# Altium PCB GT502W_M95.PcbDoc (part 2 of 2)
Units mm, origin at the board's own origin, x right, y up, seen from the top; angles counter-clockwise.
Board outline 52.64 x 68.35 mm, 2 copper layers (Top Layer, Bottom Layer), stack 0.268 mm thick; 151 components, 116 nets, 541 pads, 423 vias.
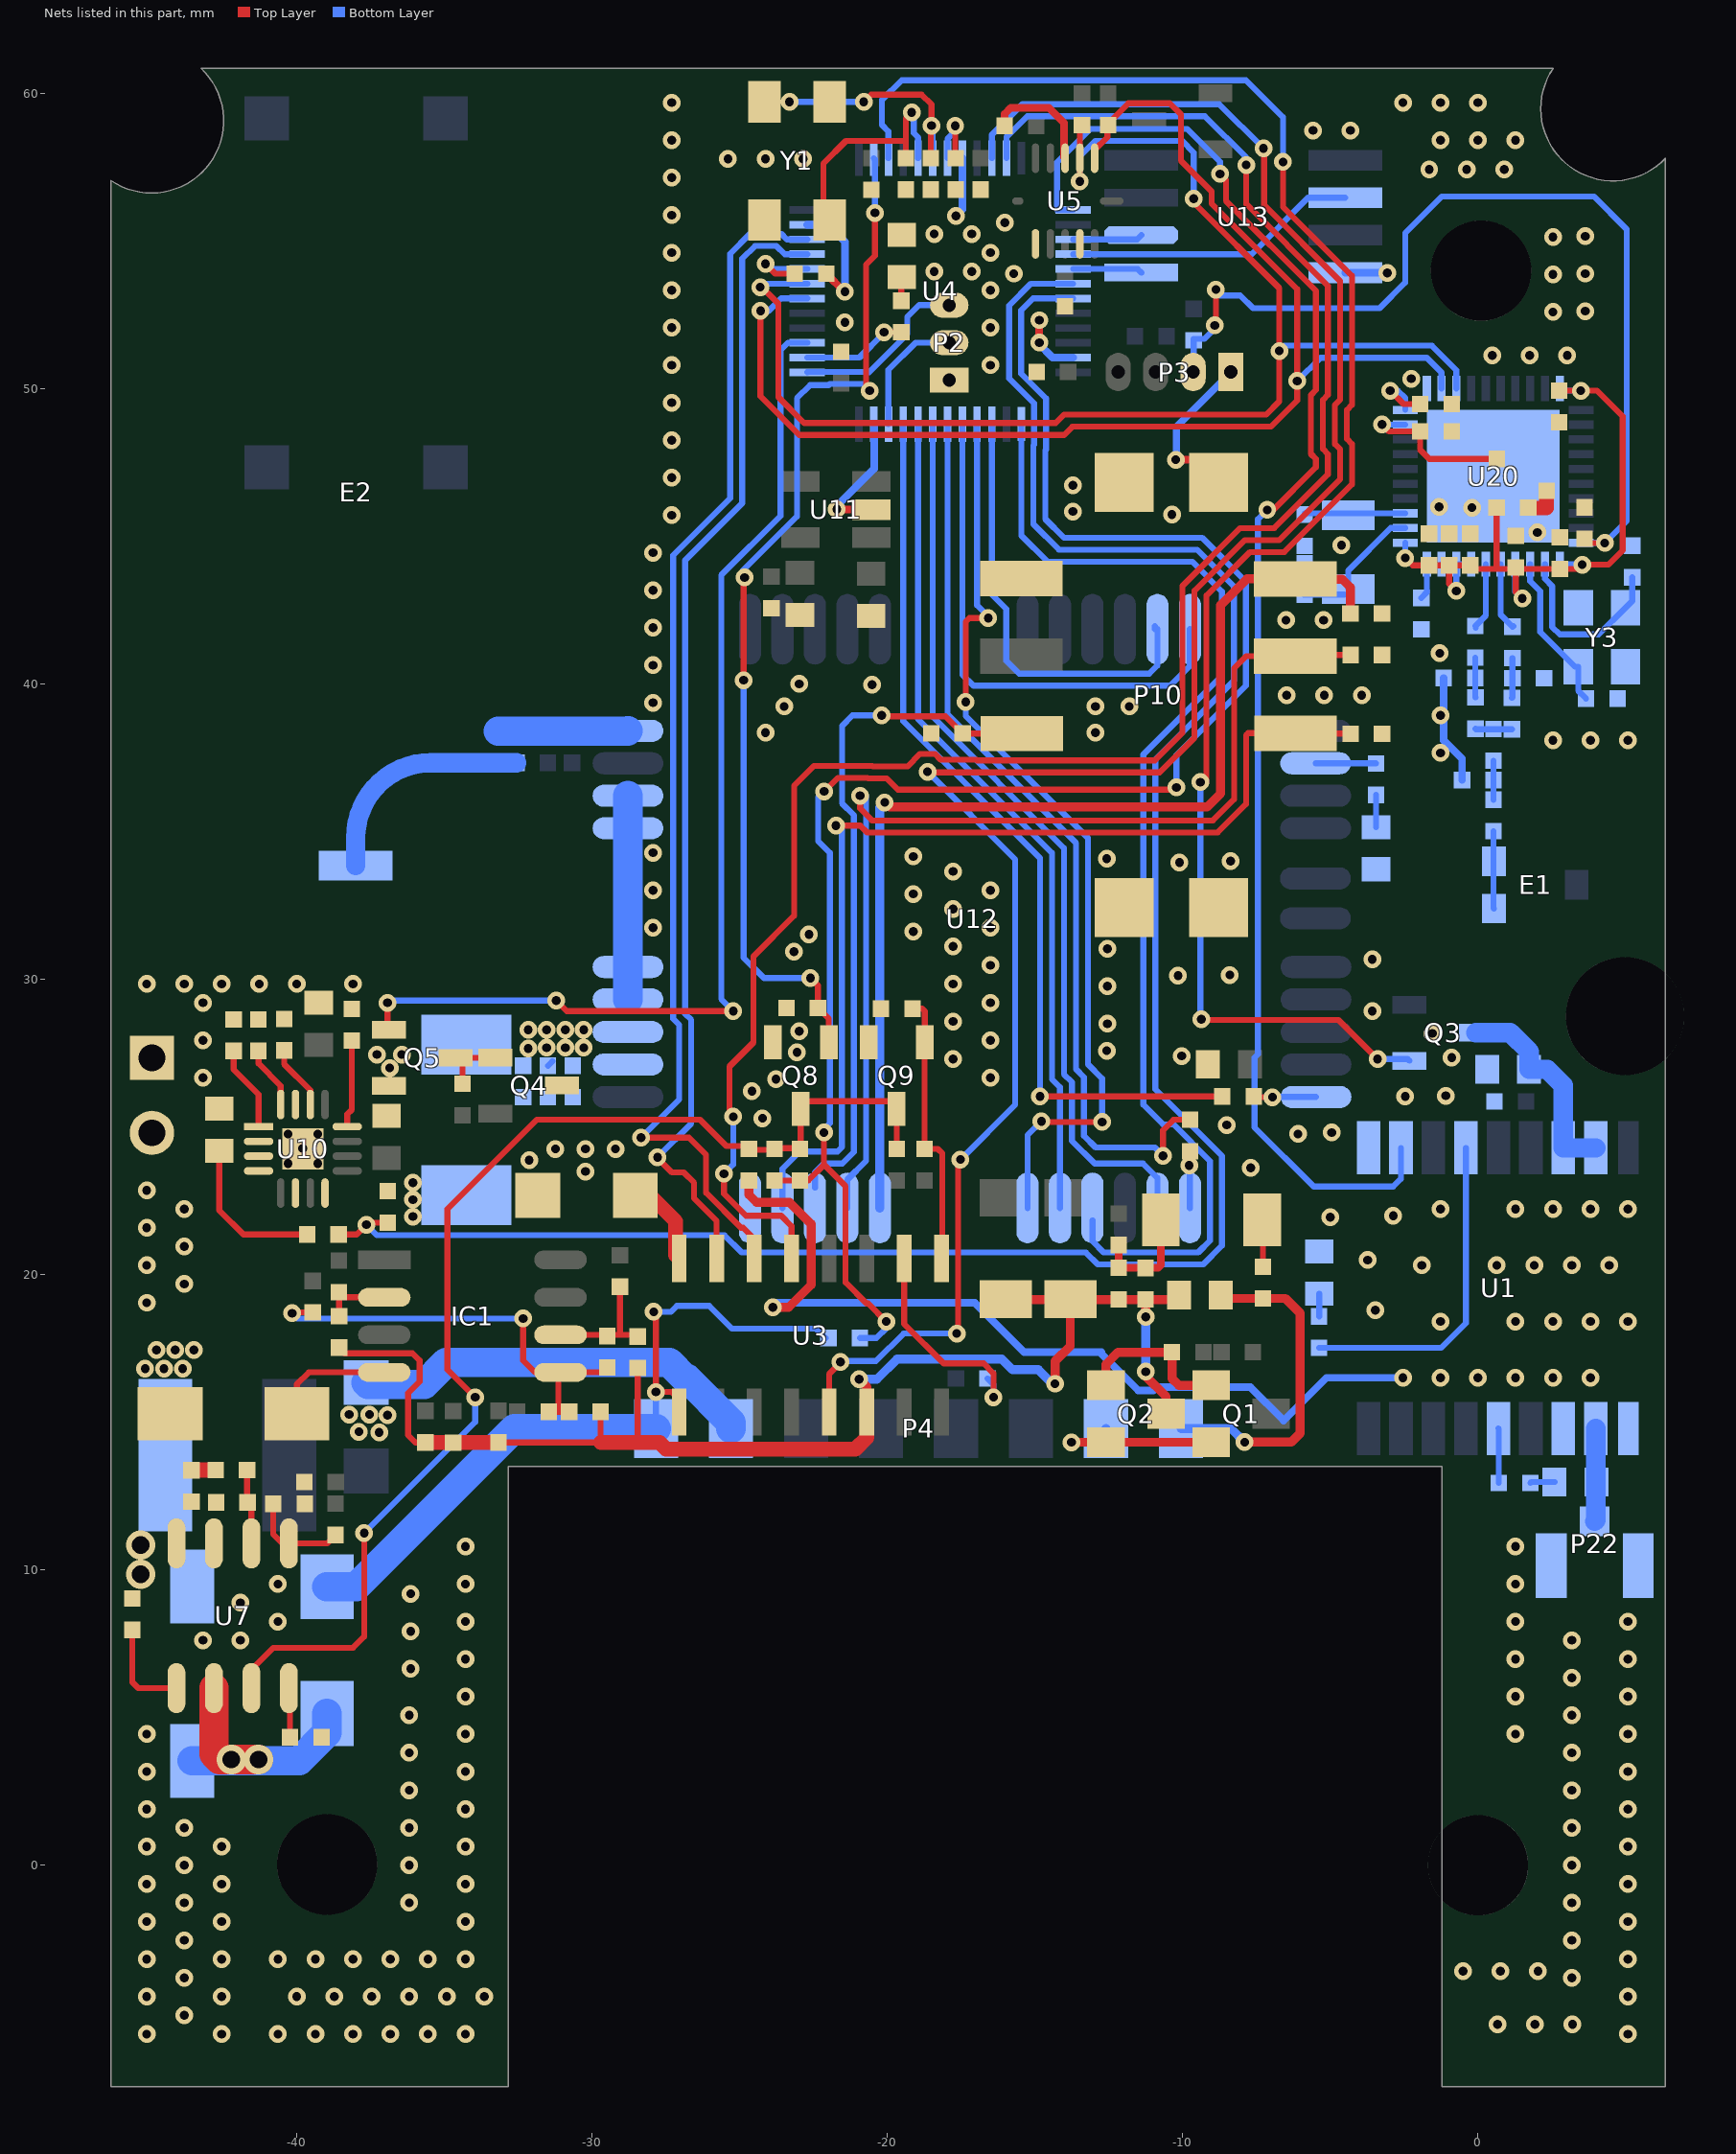
[diagram p2: the nets of this part, all layers, seen from the top]

## Via types
v1: diameter 0.6, hole 0.3, Top Layer to Bottom Layer, 412 vias
v2: diameter 1, hole 0.6, Top Layer to Bottom Layer, 6 vias
v3: diameter 0.3, hole 0.3, Top Layer to Bottom Layer, tented top, 5 vias

## Nets (pads, with @x,y where several pads share a name; then routed paths per layer and width w, separated by ;. In a path a pad name is that pad's centre, name@x,y a point inside that pad or via, vN(x,y) a via of type N, cw(c..) or ccw(c..) an arc to the next point about the centre after c; other vN are vias at no path point) (continued)
GND: C5.1 C6.2 C8.1 C10.2 C11.2 C12.2 C13.2 C14.1 C15.2 C17.2 C18.1 C19.2 C20.1 C21.2 C22.2 C25.1 C32.1 C40.1 C48.2 C49.2 C51.1 C53.2 C55.2 C56.2 C57.1 C58.1 C59.1 C62.1 C63.1 C70.1 C71.2 C72.2 C73.2 C74.2 C76.2 C77.2 C81.2 C82.2 C83.2 C84.1 C86.1 C87.1 C88.1 C89.1 C90.1 C91.1 C94.1 C95.1 C96.1 D2.2 D5.1 D9.2 D14.2 F3.2 IC1.4 L2.2 P2.1 P3.1 P4.2 P10.5 P10.8 P10.9 P10.10 P10.11 P13.1 P22.2 P22.3 Q5.2 Q8.2 Q9.2 R4.1 R11.1 R21.1 R43.2 R44.2 R45.2 R58.1 R88.2 R93.2 R96.1 R99.1 U1.1 U1.10 U1.12 U4.8 U4.23 U4.35 U4.47 U5.1 U5.4 U5.8 U7.7 U10.4 U10.6 U10.8 U10.15 U10.17 U11.2 U12.31 U12.35 U12.36 U12.37 U12.38 U12.40 U13.4 U20.1 U20.41 Y1.2 Y1.4 Y3.2 Y3.4 | length 87.2
  Top Layer w0.203: D5.1@-39.994,15.3 -39.994,16.292 -39.593,16.693 IC1.4@-37.039,16.693
  Top Layer w0.254: R11.1@-22.073,53.899 -21.463,53.289 v1(-21.438,53.289) ; v1(-21.717,45.923) -21.703,45.909 U11.2@-20.549,45.909 ; C14.1@-16.027,58.903 -16.027,59.309 -15.824,59.512 -14.529,59.512 -14.021,59.004 -14.021,57.846 U5.8@-13.984,57.809 ; v1(-14.859,51.562) v1(-14.859,52.324) ; v1(-10.236,47.6) -9.551,47.6 P10.10@-8.786,46.835 ; v1(-3.073,53.924) v1@-2.972,53.924
  Top Layer w0.305: R4.1@-24.689,23.19 -24.689,22.708 -24.435,22.454 -23.317,22.454 -22.579,21.715 -22.579,19.661 -23.342,18.898 v1(-23.876,18.898)
  Bottom Layer w0.254: v1(-23.876,18.898) -23.728,19.045 -17.039,19.045 -15.372,17.378 -12.751,17.378 -12.751,17.321 -11.513,16.083 -10.991,16.083 -10.883,16.191 -7.709,16.191 -6.58,15.062 -5.132,16.51 v1(-2.54,16.51) ; U4.47@-22.714,55.559 -22.02,55.559 -21.438,54.976 v1(-21.438,53.289) ; v1(-21.717,45.923) -21.717,46.025 -20.452,47.29 -20.452,48.797 U4.35@-20.464,48.809 ; v1(-17.678,55.855) -17.464,56.069 U4.8@-17.464,57.809 ; v1(-14.859,51.562) -14.884,51.537 -14.884,51.535 -14.408,51.059 U4.23@-13.714,51.059 ; v1(-10.236,47.6) -10.211,47.625 -10.211,48.711 -8.375,50.546 P3.1@-8.375,50.57 ; U13.4@-4.499,53.932 -3.081,53.932 v1(-3.073,53.924) ; C81.2@-1.16,40.21 -1.16,38.091 -0.54,37.471 C82.2@-0.54,36.748
  Bottom Layer w1: C21.2@-37.653,16.347 -37.588,16.281 -35.687,16.281 -34.938,17.031 -27.394,17.031 -26.856,16.493 -26.795,16.493 -25.296,14.994 P4.2@-25.296,14.79 ; C62.1@-33.172,38.405 C63.1@-30.683,38.405 -28.8,38.405 U12.40@-28.786,38.419 ; U12.35@-28.786,29.319 U12.36@-28.786,30.419 U12.37@-28.786,35.119 U12.38@-28.786,36.219
  other v1: -45.085,-5.715 -42.545,-5.715 -40.64,-5.715 -39.37,-5.715 -38.1,-5.715 -36.83,-5.715 -35.56,-5.715 -34.29,-5.715 5.08,-5.715 0.66,-5.385 1.93,-5.385 3.2,-5.385 -43.815,-5.08 -45.085,-4.445 -42.545,-4.445 -40.005,-4.445 -38.735,-4.445 -37.465,-4.445 -36.195,-4.445 -34.925,-4.445 -33.655,-4.445 5.08,-4.445 -43.815,-3.81 3.175,-3.81 -0.508,-3.581 0.762,-3.581 2.032,-3.581 -45.085,-3.175 -42.545,-3.175 -40.64,-3.175 -39.37,-3.175 -38.1,-3.175 -36.83,-3.175 -35.56,-3.175 -34.29,-3.175 5.08,-3.175 -43.815,-2.54 3.175,-2.54 -45.085,-1.905 -42.545,-1.905 -34.29,-1.905 5.08,-1.905 -43.815,-1.27 -36.195,-1.27 3.175,-1.27 -45.085,-0.635 -42.545,-0.635 -34.29,-0.635 5.08,-0.635 -43.815,0 -36.195,0 3.175,0 -45.085,0.635 -42.545,0.635 -34.29,0.635 5.08,0.635 -43.815,1.27 -36.195,1.27 3.175,1.27 -45.085,1.905 -34.29,1.905 5.08,1.905 -36.195,2.54 3.175,2.54 -45.085,3.175 -34.29,3.175 5.08,3.175 -36.195,3.81 3.175,3.81 -45.085,4.445 -34.29,4.445 1.27,4.445 5.08,4.445 -36.195,5.08 3.175,5.08 -34.29,5.715 1.27,5.715 5.08,5.715 3.175,6.35 -36.144,6.655 -34.29,6.985 1.27,6.985 5.08,6.985 -43.18,7.62 -41.91,7.62 3.175,7.62 -36.144,7.925 -40.64,8.255 -34.29,8.255 1.27,8.255 5.08,8.255 -41.91,8.89 -36.144,9.195 -40.64,9.525 -34.29,9.525 1.27,9.525 -34.29,10.795 1.27,10.795 -37.211,14.656 -37.897,14.681 -36.932,15.24 -38.227,15.265 -37.541,15.265 -1.27,16.51 0,16.51 1.27,16.51 2.54,16.51 3.81,16.51 -1.27,18.415 1.27,18.415 2.54,18.415 3.81,18.415 5.08,18.415 -3.48,18.796 -45.085,19.05 -43.815,19.685 -45.085,20.32 -1.905,20.32 0.635,20.32 1.905,20.32 3.175,20.32 4.445,20.32 -3.734,20.498 -43.815,20.955 -45.085,21.59 -5.004,21.946 -36.068,21.971 -2.87,21.996 -43.815,22.225 -1.27,22.225 1.27,22.225 2.54,22.225 3.81,22.225 5.08,22.225 -36.068,22.543 -45.085,22.86 -36.068,23.114 -30.226,23.495 -7.696,23.622 -32.131,23.876 -31.242,24.257 -30.226,24.257 -29.21,24.257 -6.096,24.765 -4.953,24.816 -8.509,25.07 -24.232,25.298 -2.464,26.035 -1.092,26.06 -24.587,26.213 -23.774,26.619 -43.18,26.67 -16.51,26.67 -36.855,27 -17.78,27.305 -0.889,27.356 -10.033,27.407 -37.287,27.457 -36.449,27.457 -23.063,27.534 -12.573,27.584 -43.18,27.94 -16.51,27.94 -1.549,28.169 -22.987,28.245 -12.548,28.499 -17.78,28.575 -3.581,28.931 -43.18,29.21 -16.51,29.21 -12.548,29.769 -45.085,29.845 -43.815,29.845 -42.545,29.845 -41.275,29.845 -40.005,29.845 -38.1,29.845 -17.78,29.845 -10.16,30.124 -8.407,30.15 -16.51,30.48 -3.581,30.683 -23.165,30.937 -12.548,31.039 -17.78,31.115 -22.657,31.521 -19.126,31.623 -27.94,31.75 -16.51,31.75 -17.78,32.385 -19.126,32.893 -27.94,33.02 -16.51,33.02 -17.78,33.655 -10.109,33.96 -8.382,34.011 -12.573,34.087 -19.126,34.163 -27.94,34.29 -1.27,37.668 2.54,38.1 3.81,38.1 5.08,38.1 -24.13,38.354 -12.954,38.354 -1.27,38.938 -23.495,39.243 -12.954,39.243 -11.811,39.243 -27.94,39.37 -6.477,39.624 -5.207,39.624 -3.937,39.624 -20.523,39.98 -22.987,40.005 -27.94,40.64 -1.295,41.046 -27.94,41.91 -6.502,42.164 -5.232,42.164 -27.94,43.18 -27.94,44.45 -4.623,44.704 2.007,45.136 -27.305,45.72 -10.363,45.745 -13.716,45.847 -0.203,45.974 -1.321,45.999 -13.716,46.736 -27.305,46.99 -27.305,48.26 -27.305,49.53 -2.261,50.343 -27.305,50.8 -16.51,50.8 0.483,51.13 1.753,51.13 3.023,51.13 -27.305,52.07 -16.51,52.07 -21.438,52.248 2.54,52.603 3.632,52.629 -27.305,53.34 -16.51,53.34 2.54,53.873 -15.723,53.899 3.632,53.899 -18.415,53.975 -17.145,53.975 -27.305,54.61 -16.51,54.61 2.54,55.143 3.632,55.169 -18.415,55.245 -17.145,55.245 -16.027,55.626 -27.305,55.88 -27.305,57.15 -1.651,57.429 -0.381,57.429 0.889,57.429 -25.4,57.785 -24.13,57.785 -22.86,57.785 -27.305,58.42 -1.27,58.42 0,58.42 1.27,58.42 -5.588,58.75 -4.318,58.75 -27.305,59.69 -2.54,59.69 -1.27,59.69 0,59.69
  other v3: -40.295,23.765 -39.295,23.765 -39.806,24.28 -40.295,24.765 -39.295,24.765
GPS_EN: Q3.1 U4.3 | length 58.7
  Top Layer w0.203: v1(-9.398,36.678) -9.214,36.678 -9.195,36.697 -9.195,42.996 -7.721,44.47 -6.561,44.47 -4.267,46.763 -4.267,48.128 -4.44,48.301 -4.44,49.286 -4.267,49.459 -4.267,53.823 -6.604,56.159 v1(-6.604,57.683) ; v1@-9.373,28.575 v1@-9.373,28.626 ; v1(-9.373,28.651) v1@-9.373,28.626 ; v1(-3.404,27.305) -4.724,28.626 v1@-9.373,28.626
  Bottom Layer w0.203: U4.3@-19.964,57.809 -19.964,58.717 -20.188,58.941 -20.188,59.779 -19.515,60.452 -7.857,60.452 -6.604,59.199 v1(-6.604,57.683) ; v1(-9.398,36.678) -9.398,28.677 v1(-9.373,28.651) ; v1(-3.404,27.305) -2.38,27.305 Q3.1@-2.319,27.244
GSM_DCD: U4.32 U12.25 | length 28.5
  Bottom Layer w0.203: U4.32@-18.964,48.809 -18.964,38.818 -14.427,34.281 -14.427,26.622 -14.156,26.351 U12.25@-14.156,22.259
GSM_DTR: R31.1 U4.33 | length 30.9
  Top Layer w0.203: v1(-14.834,26.035) R31.1@-8.661,26.035
  Bottom Layer w0.203: U4.33@-19.464,48.809 -19.464,38.743 -14.834,34.112 v1(-14.834,26.035)
GSM_POWER: U4.27 U12.10 | length 15
  Bottom Layer w0.203: U4.27@-16.464,48.809 -16.464,43.033 -15.977,42.545 -15.977,40.794 -15.537,40.354 -11.131,40.354 -10.856,40.63 U12.10@-10.856,41.859 ; U12.10@-10.947,41.859 U12.10@-10.947,41.961
GSM_PWR_EN: Q5.1 U4.39 | length 37.2
  Top Layer w0.203: v1(-36.932,29.21) -36.932,28.349 Q5.1@-36.877,28.294 ; v1(-31.217,29.286) -30.861,28.931 v1(-25.222,28.931)
  Bottom Layer w0.203: v1(-36.932,29.21) -36.855,29.286 v1(-31.217,29.286) ; v1(-25.222,28.931) -25.629,29.337 -25.629,43.688 -23.622,45.695 -23.622,51.309 -23.372,51.559 U4.39@-22.714,51.559
GSM_RI: U4.28 U12.26 | length 31.6
  Top Layer w0.203: v1(-17.348,39.395) -17.348,42.113 -17.221,42.24 v1(-16.586,42.24) ; v1(-14.783,25.197) -14.757,25.171 v1(-12.725,25.171)
  Bottom Layer w0.203: v1(-17.348,39.395) -17.348,38.926 -13.208,34.786 -13.208,27.127 -12.725,26.645 v1(-12.725,25.171) ; U4.28@-16.964,48.809 -16.964,42.669 -16.561,42.266 v1(-16.586,42.24) ; U12.26@-15.256,22.259 -15.256,24.724 v1(-14.783,25.197)
GSM_RST: U4.29 U12.11 | length 17.9
  Bottom Layer w0.203: U4.29@-17.464,48.809 -17.464,40.324 -17.088,39.948 -10.42,39.948 -9.756,40.613 U12.11@-9.756,41.859
GSM_RTS: U4.25 U12.24 | length 40.6
  Bottom Layer w0.203: U4.25@-15.464,48.809 -15.464,45.03 -14.58,44.145 -9.68,44.145 -8.669,43.134 -8.669,40.286 -11.336,37.619 -11.336,25.756 -10.672,25.091 -10.317,25.091 -9.076,23.85 -9.076,21.153 -9.474,20.754 -12.677,20.754 -13.056,21.133 U12.24@-13.056,21.844
HIGH-PASS: C39.1 IC1.5 R8.2 R37.2 R41.2 | length 15.2
  Top Layer w0.203: v1(-40.157,18.694) -40.13,18.722 C39.1@-39.46,18.722 ; v1(-32.334,18.517) -32.334,17.094 -31.933,16.693 IC1.5@-31.07,16.693 ; R41.2@-31.469,15.358 -31.115,15.358 ; R37.2@-30.779,15.361 -30.781,15.358 -31.115,15.358 ; R8.2@-29.486,16.857 -29.649,16.693 IC1.5@-31.07,16.693 ; -31.115,15.358 -31.14,15.383 -31.14,16.623 IC1.5@-31.07,16.693
  Bottom Layer w0.203: v1(-40.157,18.694) -39.98,18.517 v1(-32.334,18.517)
LED: R9.2 U4.38 | length 3.6
  Top Layer w0.203: v1(-20.117,51.918) R9.2@-19.533,51.918
  Bottom Layer w0.203: U4.38@-22.714,51.059 -20.95,51.059 -20.117,51.892 v1(-20.117,51.918)
NetC1_1: C1.1 D5.2 L1.1 U7.8
  other v1: -45.136,16.815 -44.501,16.815 -43.866,16.815 -44.755,17.45 -44.12,17.45 -43.485,17.45
  other v2: -45.288,9.855 -45.288,10.846
NetC1_2: C1.2 U7.1 | length 3.3
  Top Layer w0.203: C1.2@-45.573,7.97 -45.573,6.203 -45.37,6 U7.1@-44.079,6
NetC6_1: C6.1 U4.7 | length 2.3
  Top Layer w0.203: v1(-17.704,58.903) -17.704,57.826 C6.1@-17.69,57.812
  Bottom Layer w0.203: U4.7@-17.964,57.809 -17.964,58.467 -17.704,58.728 v1(-17.704,58.903)
NetC22_1: C22.1 D4.2 U7.2 | length 9.4
  Top Layer w1: U7.2@-42.809,6 -42.809,3.769 -42.621,3.581 v2(-42.215,3.581) v2(-41.3,3.581)
  Bottom Layer w1: C22.1@-43.544,3.54 -39.929,3.54 -38.98,4.488 D4.2@-38.98,5.14
NetC34_1: C34.1 R96.2 | length 0.8
  Top Layer w0.508: R96.2@-43.57,13.377 -43.561,13.386 C34.1@-42.753,13.386
NetC34_2: C34.2 C95.2 U7.6 | length 2.5
  Top Layer w0.203: C34.2@-41.687,13.386 -41.687,12.306 C95.2@-41.67,12.29 -41.539,12.158 U7.6@-41.539,10.9
NetC62_2: C62.2 E2.1 R78.2 | length 7.8
  Bottom Layer w0.66: E2.1@-38.008,33.853 -38.008,34.798 cw(c-35.468,34.798) -35.468,37.338 C62.2@-33.172,37.338 R78.2@-32.563,37.338
NetC78_1: C78.1 U20.25 | length 2.3
  Bottom Layer w0.203: U20.25@0.766,44.06 0.766,42.347 C78.1@1.168,41.946 ; C78.1@1.188,41.966 C78.1@1.194,41.961
NetC78_2: C78.2 C80.1 L2.1 | length 1.4
  Bottom Layer w0.203: C80.1@1.15,39.536 1.168,39.554 C78.2@1.168,40.879
NetC79_1: C79.1 U20.26 | length 2.3
  Bottom Layer w0.203: C79.1@-0.094,41.966 C79.1@-0.076,41.984 ; C79.1@-0.076,41.91 C79.1@-0.076,41.984 ; U20.26@0.266,44.06 0.266,42.326 C79.1@-0.076,41.984
NetC79_2: C79.2 C81.1 L5.1 | length 1.4
  Bottom Layer w0.203: C79.2@-0.094,40.899 -0.094,39.56 L5.1@-0.085,39.551
NetC80_2: C80.2 L3.1 L5.2 | length 1.2
  Bottom Layer w0.203: L5.2@-0.085,38.484 -0.07,38.469 C80.2@1.15,38.469
NetC82_1: C82.1 L3.2 L4.1 | length 1.3
  Bottom Layer w0.203: L4.1@0.525,36.088 L3.2@0.525,37.409
NetC83_1: C83.1 U20.40 | length 2.2
  Top Layer w0.203: v1(-2.972,49.936) -2.518,49.483 C83.1@-1.958,49.483
  Bottom Layer w0.203: v1(-2.972,49.936) -2.71,49.936 -2.459,49.686 U20.40@-2.459,49.286
NetC84_2: C84.2 U20.23 Y3.3 | length 5.4
  Bottom Layer w0.203: U20.23@1.766,44.06 1.766,43.49 2.108,43.148 2.108,41.767 3.287,40.588 Y3.3@3.395,40.588 3.395,39.777 C84.2@3.66,39.512
NetC86_2: C86.2 Q9.1 R82.2 U3.1 | length 9.4
  Top Layer w0.203: C86.2@-19.152,29.007 -18.821,29.007 -18.735,28.92 Q9.1@-18.735,27.871 -18.745,27.861 R82.2@-18.745,24.257 -18.288,24.257 -18.14,24.109 -18.14,20.572 U3.1@-18.163,20.549
NetC87_2: C87.2 U20.22 Y3.1 | length 6.3
  Bottom Layer w0.203: U20.22@2.266,44.06 2.266,43.564 2.515,43.316 2.515,41.935 2.769,41.681 4.089,41.681 Y3.1@4.993,42.585 5.221,42.813 C87.2@5.221,43.619
NetC88_2: C88.2 U20.33 Y4.1 | length 3.4
  Bottom Layer w0.203: C88.2@-5.867,45.771 -5.853,45.785 U20.33@-2.459,45.785
NetC89_2: C89.2 U20.32 Y4.2 | length 4.5
  Bottom Layer w0.203: C89.2@-5.893,43.028 C89.2@-5.867,43.028 Y4.2@-4.536,43.028 ; Y4.2@-4.394,43.22 -4.394,43.845 -2.955,45.285 U20.32@-2.459,45.285
NetC90_2: C90.2 U7.4 | length 1.7
  Top Layer w0.203: U7.4@-40.269,6 -40.23,5.962 C90.2@-40.23,4.339
NetD1_1: D1.1 R24.1 | length 1.6
  Top Layer w0.203: D1.1@-7.309,21.856 -7.281,21.827 R24.1@-7.281,20.264
NetD2_1: D2.1 R9.1 | length 0.8
  Top Layer w0.203: R9.1@-19.533,52.984 -19.533,53.77 D2.1@-19.51,53.792
NetD9_1: D9.1 R28.2 | length 0.8
  Bottom Layer w0.203: R28.2@-5.38,18.59 -5.38,19.355 D9.1@-5.377,19.359
NetD14_1: D14.1 R35.1 | length 1.1
  Bottom Layer w0.203: D14.1@-3.454,35.154 R35.1@-3.454,36.246
NetE1_1: E1.1 L4.2 | length 2.6
  Bottom Layer w0.203: L4.2@0.525,35.021 0.525,32.418 E1.1@0.542,32.401
NetF3_1: F3.1 U3.8 | length 3
  Top Layer w0.5: F3.1@-28.538,22.68 -28.04,22.68 -27.169,21.81 -27.169,20.665 U3.8@-27.053,20.549
NetFB1_2: FB1.2 R1.1 | length 1.2
  Top Layer w0.5: FB1.2@1.699,45.975 1.713,45.961 2.324,45.961 R1.1@2.324,46.549
NetIC1_2: IC1.2 R27.2 R36.2 | length 2.4
  Top Layer w0.203: R36.2@-38.58,19.411 R36.2@-38.572,19.403 ; R27.2@-38.572,18.598 R36.2@-38.572,19.403 ; IC1.2@-37.039,19.233 -38.402,19.233 R36.2@-38.572,19.403
NetIC1_6: IC1.6 R8.1 R38.1 R39.2 | length 4.3
  Top Layer w0.203: IC1.6@-31.07,17.963 -29.058,17.963 ; R39.2@-29.056,19.592 -29.056,17.965 -29.058,17.963 ; R38.1@-28.456,17.908 -28.511,17.963 -29.058,17.963
NetL68_1: L68.1 R77.1 | length 0.8
  Bottom Layer w0.203: R77.1@1.77,12.945 1.805,12.979 L68.1@2.591,12.979
NetL68_2: L68.2 P22.1 U1.11 | length 3.2
  Bottom Layer w0.66: P22.1@3.951,11.648 3.99,11.687 U1.11@3.99,14.794
NetQ1_1: Q1.1 Q2.1 R23.1 | length 5.4
  Top Layer w0.305: Q2.1@-12.598,16.256 -12.598,16.967 -12.192,17.374 R23.1@-10.363,17.374 -10.363,16.485 -10.135,16.256 Q1.1@-9.042,16.256
NetQ4_1: Q4.1 Q5.3 R49.2 | length 2.3
  Top Layer w0.203: R49.2@-34.392,26.467 -34.392,27.109 Q5.3@-34.627,27.344 -33.286,27.344 Q4.1@-33.274,27.356
NetR11_2: R11.2 U4.44 | length 2.6
  Top Layer w0.203: v1(-24.13,54.229) -23.8,53.899 R11.2@-23.139,53.899
  Bottom Layer w0.203: v1(-24.13,54.229) -23.96,54.059 U4.44@-22.714,54.059
NetR19_1: R19.1 R21.2 U7.5 | length 3.4
  Top Layer w0.203: R21.2@-40.8,12.244 -40.8,11.209 -40.491,10.9 U7.5@-40.269,10.9 -38.977,10.9 R19.1@-38.694,11.183
NetR28_1: R28.1 U1.4 | length 11.3
  Bottom Layer w0.203: R28.1@-5.38,17.523 -1.248,17.523 -0.41,18.361 U1.4@-0.41,24.294
NetR31_2: R31.2 U12.20 | length 2.1
  Top Layer w0.203: R31.2@-7.595,26.035 -7.569,26.01 v1(-6.96,26.01)
  Bottom Layer w0.203: v1(-6.96,26.01) -6.95,26.019 U12.20@-5.486,26.019
NetR33_2: R33.2 U12.21 | length 1.9
  Top Layer w0.203: v1(-9.779,23.698) -9.779,24.155 R33.2@-9.754,24.181
  Bottom Layer w0.203: v1(-9.779,23.698) -9.756,23.675 U12.21@-9.756,22.259 U12.21@-9.754,22.257
NetR35_2: R35.2 U12.13 | length 2
  Bottom Layer w0.203: U12.13@-5.496,37.319 -3.461,37.319 R35.2@-3.454,37.313
NetR43_1: R43.1 U10.12 | length 3
  Top Layer w0.203: U10.12@-38.295,25.015 -38.295,25.433 -38.14,25.589 R43.1@-38.14,27.93
NetR44_1: R44.1 U10.14 | length 2.2
  Top Layer w0.203: R44.1@-40.43,27.593 -40.43,27.132 -39.545,26.247 U10.14@-39.545,25.765
NetR45_1: R45.1 U10.16 | length 2.1
  Top Layer w0.203: R45.1@-41.3,27.58 -41.3,27.152 -40.545,26.398 U10.16@-40.545,25.765
NetR77_2: R77.2 U1.14 | length 1.9
  Bottom Layer w0.203: U1.14@0.69,14.794 0.703,14.78 R77.2@0.703,12.945
NetR83_1: R83.1 U3.2 | length 7.5
  Top Layer w0.203: U3.2@-19.433,20.549 -19.433,18.334 -18.092,16.993 -16.739,16.993 -16.408,16.662 v1(-16.408,15.85)
  Bottom Layer w0.203: R83.1@-16.612,16.485 -16.408,16.281 v1(-16.408,15.85)
NetR88_1: R88.1 U10.1 | length 2.9
  Top Layer w0.203: R88.1@-42.14,27.58 -42.14,26.951 -41.295,26.106 U10.1@-41.295,25.015
NetR99_2: R99.2 U20.30 | length 1.2
  Bottom Layer w0.203: R99.2@-1.92,42.92 -1.734,43.106 U20.30@-1.734,44.06
OSC1: C8.2 U4.5 Y1.3 | length 8.4
  Top Layer w0.203: Y1.3@-21.961,55.717 -22.169,55.925 -22.169,57.629 -21.404,58.395 -19.377,58.395 ; C8.2@-19.377,57.812 -19.377,58.395 ; v1(-19.177,59.36) -19.377,59.16 -19.377,58.395
  Bottom Layer w0.203: v1(-19.177,59.36) -19.112,59.295 -19.112,58.66 -18.964,58.512 U4.5@-18.964,57.809
OSC2: C15.1 U4.6 Y1.1 | length 8
  Top Layer w0.203: v1(-20.803,59.715) -20.553,59.965 -18.842,59.965 -18.507,59.63 v1(-18.507,58.91) -18.534,58.883 C15.1@-18.534,57.812
  Bottom Layer w0.203: v1(-23.317,59.715) v1(-20.803,59.715) ; v1(-18.507,58.91) -18.464,58.868 U4.6@-18.464,57.809
OUTPUT1: U3.7 U4.45 | length 38.8
  Top Layer w0.203: v1(-27.788,23.978) -27.788,23.952 -27.3,23.465 -26.902,23.465 -26.548,23.111 -26.548,22.585 -25.783,21.821 U3.7@-25.783,20.549
  Bottom Layer w0.203: v1(-27.788,23.978) -26.645,25.121 -26.645,28.629 -26.848,28.832 -26.848,44.193 -24.917,46.123 -24.917,54.407 -24.486,54.839 -23.757,54.839 -23.478,54.559 U4.45@-22.714,54.559
OUTPUT2: U3.6 U4.46 | length 41
  Top Layer w0.203: v1(-28.346,24.638) -26.721,24.638 -26.141,24.059 -26.141,22.773 -24.959,21.59 -24.884,21.59 -24.513,21.219 U3.6@-24.513,20.549
  Bottom Layer w0.203: v1(-28.346,24.638) -27.051,25.933 -27.051,28.46 -27.254,28.664 -27.254,44.361 -25.324,46.292 -25.324,54.575 -24.654,55.245 -23.589,55.245 -23.403,55.059 U4.46@-22.714,55.059
PEAK: C36.1 C37.1 D1.2 R25.1 | length 3.8
  Top Layer w0.254: C37.1@-12.168,21.006 -12.171,21.003 R25.1@-12.171,20.235 -10.83,20.235 -10.738,20.326 D1.2@-10.738,21.856
PW_ON: C68.1 Q8.3 Q9.3 R3.1 R4.2 R68.1 U7.3 | length 41.4
  Top Layer w0.203: U7.3@-41.539,6 -41.539,6.62 -40.792,7.366 -38.1,7.366 -37.719,7.747 v1(-37.719,11.252) ; v1(-33.96,15.85) -34.9,16.789 -34.9,22.225 -31.877,25.248 -26.34,25.248 -25.451,24.359 -24.702,24.359 R4.2@-24.625,24.282 ; R4.2@-24.625,24.232 C68.1@-23.774,24.232 ; C68.1@-23.774,24.282 -22.936,24.282 Q8.3@-22.936,25.621 -22.936,25.875 -19.685,25.875 Q9.3@-19.685,25.621 R3.1@-19.685,24.257
  Bottom Layer w0.203: v1(-37.719,11.252) -33.96,15.011 v1(-33.96,15.85)
PWR_EN: Q8.1 R93.1 U4.2 | length 35.5
  Top Layer w0.203: v1(-24.867,40.132) -24.867,43.586 v1(-24.841,43.612) ; v1(-22.606,30.048) -22.352,29.794 R93.1@-22.352,29.032 -21.986,28.666 Q8.1@-21.986,27.871 ; v1(-20.599,49.936) -20.722,50.059 -20.722,54.208 -20.422,54.508 v1(-20.422,55.956)
  Bottom Layer w0.203: v1(-24.867,40.132) -24.867,30.734 -24.181,30.048 v1(-22.606,30.048) ; v1(-24.841,43.612) -24.884,43.655 -24.884,43.858 -23.063,45.679 -23.063,49.682 -22.618,50.127 -21.988,50.127 -21.95,50.165 -20.828,50.165 v1(-20.599,49.936) ; U4.2@-20.464,57.809 -20.426,57.771 v1@-20.426,55.956
RFID_ANT1: P4.7 Q1.2 Q2.2 | length 6.1
  Top Layer w0.305: v1(-13.767,14.326) Q2.2@-12.598,14.326 Q1.2@-9.042,14.326
  Bottom Layer w0.305: v1(-13.767,14.326) -13.061,14.326 P4.7@-12.596,14.79
RFID_ANT2: C35.2 P4.8 R24.2 | length 11.4
  Top Layer w0.305: C35.2@-8.708,19.306 -8.6,19.198 R24.2@-7.281,19.198 -6.523,19.198 -6.02,18.694 -6.02,14.636 -6.325,14.33 v1(-7.904,14.33)
  Bottom Layer w0.305: P4.8@-10.056,14.79 -8.364,14.79 v1(-7.904,14.33)
RFID_CLK: U3.5 U4.11 | length 66
  Top Layer w0.203: v1(-25.534,23.419) -25.534,22.74 -24.79,21.996 -23.597,21.996 -23.243,21.643 U3.5@-23.243,20.549 ; v1(-25.222,25.349) -25.349,25.476 -25.349,27.051 -24.536,27.864 -24.536,30.782 -23.16,32.158 -23.16,36.553 -22.481,37.232 -20.511,37.232 -20.49,37.211 -19.321,37.211 -18.894,37.638 -18.393,37.638 -18.195,37.44 -16.993,37.44 -16.967,37.414 -10.947,37.414 -10.008,38.354 -10.008,43.332 -8.058,45.282 -6.897,45.282 -5.08,47.1 -5.08,47.791 -5.253,47.964 -5.253,49.623 -5.08,49.796 -5.08,53.486 -7.849,56.255 v1(-7.849,57.582)
  Bottom Layer w0.203: v1(-25.534,23.419) -25.222,23.73 v1(-25.222,25.349) ; U4.11@-15.964,57.809 -15.964,58.531 -15.263,59.233 -9.25,59.233 -7.849,57.831 v1(-7.849,57.582)
RFID_DEMOD: U3.13 U4.10 | length 71.8
  Top Layer w0.203: U3.13@-21.973,15.349 -21.973,16.635 -21.565,17.043 v1@-21.514,17.043 ; v1(-18.644,37.033) -18.618,37.008 -10.779,37.008 -9.601,38.186 -9.601,43.164 -7.889,44.876 -6.729,44.876 -4.674,46.932 -4.674,47.96 -4.847,48.133 -4.847,49.454 -4.674,49.627 -4.674,53.654 -7.244,56.224 -7.244,58.12 v1(-7.264,58.141) ; v1(-17.653,18.009) -17.609,18.053 -17.609,23.832 -17.539,23.901 v1(-17.526,23.901)
  Bottom Layer w0.203: v1(-21.59,17.043) -21.559,17.075 -20.389,17.075 -19.455,18.009 v1(-17.653,18.009) ; v1(-18.644,37.033) -15.672,34.061 -15.672,25.756 v1(-17.526,23.901) ; U4.10@-16.464,57.809 -16.464,58.606 -15.431,59.639 -8.763,59.639 v1(-7.264,58.141)
RFID_GND: C35.1 C36.2 C38.1 D3.2 D6.1 Q2.3 R25.2 R26.2 R27.1 R37.1 R38.2 R40.1 U3.14 | length 47.5
  Top Layer w0.203: R27.1@-38.572,17.532 -38.382,17.341 -36.086,17.341 -35.845,17.1 -35.845,16.378 -36.231,15.991 -36.231,14.569 -35.982,14.32 C38.1@-35.647,14.32 ; R40.1@-33.178,14.32 R40.1@-33.176,14.322 -29.712,14.322 ; -29.712,14.32 -29.712,14.322 ; R37.1@-29.712,15.361 -29.712,14.322 ; -28.556,14.32 -28.456,14.419 R38.2@-28.456,16.841
  Top Layer w0.305: v1(-20.955,16.459) -20.703,16.208 U3.14@-20.703,15.349 ; D3.2@-15.99,19.152 -15.982,19.16 D6.1@-13.81,19.16 ; v1(-14.326,16.307) -14.326,17.069 -13.81,17.584 D6.1@-13.81,19.16 ; D6.1@-13.798,19.171 D6.1@-13.81,19.16 ; R25.2@-12.171,19.168 R25.2@-12.171,19.16 ; v1@-11.278,16.586 -10.566,15.875 Q2.3@-10.566,15.291 ; v1(-11.252,18.567) -11.252,19.148 C36.2@-11.264,19.16 ; C35.1@-10.131,19.306 -10.278,19.16 C36.2@-11.264,19.16 ; D6.1@-13.81,19.16 R25.2@-12.171,19.16 ; R25.2@-12.171,19.16 C36.2@-11.264,19.16
  Top Layer w0.508: C38.1@-35.647,14.32 R40.1@-33.178,14.32 ; -29.712,14.32 -28.556,14.32 -27.72,14.32 -27.493,14.092 -21.087,14.092 -20.703,14.476 U3.14@-20.703,15.349
  Bottom Layer w0.305: v1(-20.955,16.459) -20.358,16.459 -19.672,17.145 -16.129,17.145 -15.769,16.785 -14.892,16.785 -14.414,16.307 v1(-14.326,16.307) ; v1(-11.252,16.713) v1(-11.252,18.567)
RST_N: C96.2 P3.2 R60(NA).2 U20.20 | length 33
  Top Layer w0.203: v1(-8.877,53.361) -8.877,52.158 v1@-8.865,52.146 ; C96.2@3.605,44.919 3.744,44.78 v1(4.293,44.78)
  Bottom Layer w0.203: P3.2@-9.627,50.588 -9.627,51.638 -9.627,51.689 -9.271,51.689 -8.915,52.045 v1(-8.915,52.146) ; v1(-8.877,53.361) -8.877,53.2 -8.839,53.162 -8.052,53.162 -7.62,52.73 -3.327,52.73 -2.464,53.594 -2.464,55.27 -1.219,56.515 3.928,56.515 5.034,55.409 5.034,45.521 v1(4.293,44.78) 4.288,44.785 U20.20@3.491,44.785
SCL: R6.1 U4.42 U5.6 U20.2 | length 45.4
  Top Layer w0.203: v1(-24.298,52.638) -24.298,49.749 -22.987,48.438 -14.016,48.438 -13.737,48.717 -7.01,48.717 -6.121,49.606 v1(-6.121,50.267) -6.121,53.378 -9.022,56.278 -9.022,56.689 -10.058,57.726 -10.058,59.29 -10.439,59.67 -11.841,59.67 -12.522,58.989 R6.1@-12.522,58.928 ; U5.6@-12.984,57.809 -12.984,58.086 -12.548,58.522 R6.1@-12.548,58.903
  Bottom Layer w0.203: v1(-24.298,52.638) -24.019,52.638 -23.598,53.059 U4.42@-22.714,53.059 ; v1(-6.121,50.267) -5.334,51.054 -1.732,51.054 -1.234,50.556 U20.2@-1.234,50.01
SD_MISO: U4.16 U13.2 | length 10
  Bottom Layer w0.203: U4.16@-13.714,54.559 -7.671,54.559 -5.758,56.472 U13.2@-4.499,56.472
SD_MOSI: U4.17 U13.5 | length 2.4
  Bottom Layer w0.203: U4.17@-13.714,54.059 -11.526,54.059 U13.5@-11.399,53.932
SD_SCK: U4.15 U13.6 | length 2.4
  Bottom Layer w0.203: U4.15@-13.714,55.059 -11.542,55.059 U13.6@-11.399,55.202
SDA: R7.1 U4.43 U5.7 U20.3 | length 46.8
  Top Layer w0.203: v1(-24.308,53.442) -24.246,53.442 -23.693,52.889 -23.693,49.718 -22.819,48.844 -14.3,48.844 -14.021,49.124 -7.179,49.124 -6.731,49.571 v1(-6.731,51.283) -6.731,53.413 -9.627,56.308 v1(-9.627,56.439) ; R7.1@-13.487,58.903 -13.484,58.899 U5.7@-13.484,57.809 v1@-13.484,57.027
  Bottom Layer w0.203: v1@-24.241,53.559 U4.43@-22.714,53.559 ; v1(-13.487,57.023) -13.487,57.863 -12.954,58.397 -10.023,58.397 -9.627,58.001 v1(-9.627,56.439) ; v1(-6.731,51.283) -6.553,51.46 -1.564,51.46 -0.734,50.63 U20.3@-0.734,50.01
SENS_BAT: R58.2 R74.1 U4.18 | length 73.9
  Top Layer w0.203: R74.1@-38.583,21.361 -37.973,21.361 v1(-37.643,21.692) -37.571,21.764 R58.2@-36.921,21.764
  Bottom Layer w0.203: v1(-37.643,21.692) -37.287,21.336 -25.519,21.336 -24.937,20.754 -24.374,20.754 -24.372,20.757 -23.839,20.757 -23.837,20.754 -23.274,20.754 -23.272,20.757 -22.739,20.757 -22.737,20.754 -22.174,20.754 -22.172,20.757 -21.639,20.757 -21.637,20.754 -21.074,20.754 -21.072,20.757 -20.539,20.757 -20.537,20.754 -19.974,20.754 -19.972,20.757 -15.539,20.757 -15.535,20.752 -13.284,20.752 -12.88,20.348 -9.306,20.348 -8.669,20.984 -8.669,24.019 -10.93,26.279 -10.93,37.451 -8.263,40.118 -8.263,43.302 -9.512,44.552 -14.189,44.552 -15.058,45.42 -15.058,48.086 -15.032,48.111 -15.032,49.507 -15.875,50.349 -15.875,52.823 -15.138,53.559 U4.18@-13.714,53.559
SENS_VIN: C68.2 R67.2 R68.2 U4.19 | length 59.6
  Top Layer w0.203: C68.2@-23.825,23.19 R68.2@-22.962,23.19 -22.682,23.19 -22.149,23.724 ; v1(-22.149,24.816) -22.149,23.724 ; v1(-22.139,36.365) -21.679,36.825 -20.679,36.825 -20.658,36.805 -20.022,36.805 -19.641,36.424 -10.287,36.424 v1(-10.211,36.5) ; v1(-20.041,18.415) -20.65,19.025 -20.707,19.025 -21.419,19.736 -21.419,22.993 -22.149,23.724
  Bottom Layer w0.203: v1(-22.149,24.816) -22.149,24.924 -21.946,25.127 -21.946,34.29 -22.347,34.692 -22.347,36.174 -22.156,36.365 v1(-22.139,36.365) ; R67.2@-20.93,17.856 -20.371,17.856 -20.041,18.186 v1(-20.041,18.415) ; U4.19@-13.714,53.059 -15.064,53.059 -15.469,52.654 -15.469,50.518 -14.626,49.675 -14.626,47.943 -14.651,47.918 -14.651,45.589 -14.021,44.958 -9.344,44.958 -7.857,43.471 -7.857,39.949 -10.211,37.595 v1(-10.211,36.5)
SIM_CLK: C58.2 P10.3 U12.30 | length 34.8
  Top Layer w0.203: v1(-21.742,35.204) -20.92,35.204 -20.692,34.976 -8.812,34.976 -7.854,35.933 -7.854,38.27 -7.784,38.34 P10.3@-6.18,38.34 -6.161,38.321 C58.2@-4.317,38.321
  Bottom Layer w0.203: U12.30@-23.556,22.259 -23.556,23.587 -22.972,24.17 -21.693,24.17 -21.539,24.324 v1@-21.539,35.204
SIM_DATA: C59.2 P10.7 U12.29 | length 23.2
  Top Layer w0.203: v1(-20.193,38.938) -20.168,38.913 -18.034,38.913 C59.2@-17.45,38.329 -17.446,38.325 P10.7@-15.446,38.325
  Bottom Layer w0.203: U12.29@-22.456,22.946 -22.456,23.468 -22.159,23.764 -21.524,23.764 -21.133,24.155 -21.133,35.56 -21.534,35.962 -21.534,38.587 -21.184,38.938 v1(-20.193,38.938)
SIM_RST: C57.2 P10.2 U12.28 | length 36.4
  Top Layer w0.203: v1(-20.93,36.22) -20.93,35.789 -20.523,35.382 -8.98,35.382 -8.261,36.101 -8.261,40.538 -7.854,40.945 P10.2@-6.186,40.945 -6.145,40.986 C57.2@-4.317,40.986
  Bottom Layer w0.203: U12.28@-21.356,22.259 -21.356,23.221 -20.726,23.851 v1@-20.726,36.22
SIM_VDD: C56.1 P10.1 U12.27 | length 37.6
  Top Layer w0.305: v1(-20.091,35.992) -19.939,35.839 -9.169,35.839 -8.718,36.291 -8.718,42.67 -7.823,43.565 P10.1@-6.186,43.565 -6.175,43.553 -4.597,43.553 -4.318,43.274 C56.1@-4.318,42.393
  Bottom Layer w0.305: U12.27@-20.256,22.259 -20.256,35.828 v1(-20.091,35.992)
SWCLK: P2.2 U4.34 | length 4.3
  Bottom Layer w0.203: U4.34@-19.964,48.809 -19.964,50.64 -19.042,51.562 P2.2@-17.907,51.562
SWDIO: P2.3 U4.37 | length 6.1
  Bottom Layer w0.203: U4.37@-22.714,50.559 -22.702,50.571 -20.66,50.571 -20.647,50.559 -20.62,50.559 -19.329,51.85 -19.329,52.426 -18.923,52.832 P2.3@-17.907,52.832
UART1_RX: U4.31 U12.22 | length 30.7
  Bottom Layer w0.203: U4.31@-18.464,48.809 -18.464,38.892 -14.021,34.449 -14.021,26.791 -13.749,26.519 -13.749,24.534 -12.979,23.764 -11.343,23.764 -10.856,23.276 U12.22@-10.856,22.259
UART1_TX: R33.1 U4.30 | length 30.9
  Top Layer w0.203: v1(-10.668,24.028) -10.668,24.892 -10.312,25.248 R33.1@-9.754,25.248
  Bottom Layer w0.203: U4.30@-17.964,48.809 -17.964,38.967 -13.614,34.617 -13.614,26.959 -13.343,26.687 -13.343,24.702 -12.948,24.308 -10.947,24.308 v1(-10.668,24.028)
UART2_RX: U1.2 U4.13 | length 50.7
  Top Layer w0.203: v1(-8.738,57.277) -8.534,57.074 -8.534,56.366 -5.486,53.318 -5.486,49.964 -5.659,49.791 -5.659,47.796 -5.486,47.623 -5.486,47.343 -6.982,45.847 -7.087,45.847 v1(-7.137,45.898)
  Bottom Layer w0.203: U4.13@-13.714,56.059 -14.251,56.059 -14.251,57.675 -13.122,58.803 -9.854,58.803 -8.738,57.686 v1(-8.738,57.277) ; v1(-7.137,45.898) -7.45,45.585 -7.45,27.467 -7.564,27.352 -7.564,24.989 -5.563,22.987 -2.87,22.987 -2.61,23.247 U1.2@-2.61,24.294
VBAT: C25.2 P13.2 R74.2 U10.2 U10.3 | length 5.3
  Top Layer w0.203: C25.2@-42.627,24.194 -42.627,22.18 -41.808,21.361 R74.2@-39.649,21.361
VDD1: C91.2 FB2.1 U20.39 | length 5.5
  Top Layer w0.203: v1(-3.251,48.793) -3.014,48.556 C91.2@-1.958,48.556 -1.958,47.932 -1.651,47.625 FB2.1@0.635,47.625
  Bottom Layer w0.203: v1(-3.251,48.793) -3.244,48.786 U20.39@-2.459,48.786
VDD_RF: C71.1 C72.1 C73.1 C74.1 C76.1 C77.1 FB1.1 U20.10 U20.21 U20.24 U20.27 U20.28 U20.29 U20.31 | length 24.2
  Top Layer w0.203: v1(-2.464,44.272) -2.215,44.023 C71.1@-1.662,44.023 C72.1@-0.978,44.023 ; v1(-0.737,43.155) -0.978,43.396 C72.1@-0.978,44.023 ; FB1.1@0.632,45.975 0.632,43.931 0.66,43.903 ; C74.1@1.276,43.953 C74.1@1.276,43.903 ; v1(1.499,42.901) 1.276,43.124 C74.1@1.276,43.903 ; C77.1@2.743,49.936 v1(3.48,49.936) 4.034,49.936 4.897,49.073 4.897,44.53 4.411,44.044 v1(3.531,44.044) 3.39,43.903 C76.1@2.77,43.903 C74.1@1.276,43.903 ; C72.1@-0.978,44.023 C73.1@-0.266,44.023 -0.146,43.903 0.66,43.903 ; 0.66,43.903 C74.1@1.276,43.903
  Bottom Layer w0.203: v1(-2.464,44.272) -2.464,44.78 U20.31@-2.459,44.785 ; U20.29@-1.234,44.06 U20.28@-0.734,44.06 ; v1(-0.737,43.155) -0.734,43.157 U20.28@-0.734,44.06 ; U20.27@-0.234,44.06 U20.28@-0.734,44.06 ; U20.24@1.266,44.06 1.266,43.133 v1(1.499,42.901) ; U20.21@2.766,44.06 3.514,44.06 v1(3.531,44.044) ; U20.10@2.766,50.01 2.84,49.936 v1(3.48,49.936)
VGPS: C40.2 Q3.3 U1.7 U1.8 | length 7.3
  Bottom Layer w0.66: Q3.3@-0.069,28.194 1.092,28.194 1.73,27.556 C40.2@1.73,26.953 2.347,26.953 2.89,26.41 U1.7@2.89,24.294 U1.8@3.99,24.294
VGSM: C48.1 C49.1 C51.2 C53.1 Q4.3 U12.33 U12.34 | length 0.2
  Bottom Layer w0.203: C51.2@-31.496,27.076 C51.2@-31.344,27.229
  other v1: -32.165,27.661 -31.538,27.686 -30.912,27.686 -30.285,27.686 -32.165,28.296 -31.538,28.296 -30.912,28.296 -30.285,28.296
VIN: D4.1 P4.1 R67.1 U3.9 | length 25
  Top Layer w0.203: v1(-27.915,18.745) -27.838,18.669 v1(-27.838,16.027) -27.305,16.027 -27.053,15.776 U3.9@-27.053,15.349
  Bottom Layer w0.203: v1(-27.915,18.745) -27.326,18.745 -27.13,18.94 -26.033,18.94 -25.263,18.17 -22.412,18.17 R67.1@-22.098,17.856 ; v1(-27.838,16.027) -27.836,16.025 P4.1@-27.836,14.79
  Bottom Layer w1: D4.1@-38.98,9.436 -37.985,9.436 -32.63,14.79 P4.1@-27.836,14.79
pads on no net: E1.2 E2.2 E2.3 E2.4 E2.5 P10.6 U1.3 U1.5 U1.9 U1.13 U1.15 U1.16 U1.17 U1.18 U4.12 U5.2 U5.10 U5.11 U5.12 U10.7 U10.9 U11.4 U12.1 U12.2 U12.3 U12.4 U12.5 U12.6 U12.7 U12.8 U12.9 U12.12 U12.14 U12.15 U12.16 U12.17 U12.18 U12.23 U12.32 U12.41 U12.42 U20.4 U20.5 U20.6 U20.7 U20.8 U20.9 U20.11 U20.12 U20.13 U20.14 U20.15 U20.16 U20.19 U20.36 U20.37 U20.38

## Polygon pours and split planes (outlines as drawn)
GND on Bottom Layer "Bottom Layer-GND" (solid, remove dead copper, pour order 1001): -46.291,-7.497 -46.203,30.404 -30.836,30.404 -28.651,31.612 -28.651,60.832 2.543,60.854 2.543,60.852 ccw(c4.57,59.486) 6.343,57.803 6.35,57.797 6.325,37.236 -3.124,37.262 -3.099,31.267 6.248,24.486 6.35,-7.497 -1.219,-7.497 -1.219,13.513 -32.842,13.513 -32.842,-7.497
GND on Top Layer "Top Layer-GND" (solid, remove dead copper, pour order 1001): -46.291,-7.497 -46.203,30.404 -30.836,30.404 -28.651,31.612 -28.651,60.832 2.543,60.854 2.543,60.852 ccw(c4.57,59.486) 6.343,57.803 6.35,57.797 6.325,37.236 -3.124,37.262 -3.099,31.267 6.248,24.486 6.35,-7.497 -1.219,-7.497 -1.219,13.513 -32.842,13.513 -32.842,-7.497

## Keep-outs
Keep-Out Layer:
  lines w0.1: -46.291,57.048 -46.291,-7.497 -32.842,-7.497 -32.842,13.513 -1.219,13.513 -1.219,-7.497 6.35,-7.497 6.35,57.797 ; -46.289,57.048 ccw(c-44.923,59.076) -43.24,60.849 ; -43.24,60.854 2.543,60.854 ; 2.543,60.852 ccw(c4.57,59.486) 6.343,57.803

## Other copper
Top Layer:
  region net NetC1_1: -43.18,14.351 -43.18,17.78 -45.339,17.78 -45.466,17.653 -45.466,14.351
  region net 5V: -39.167,25.375 -39.167,26.365 -39.751,26.949 -39.751,28.194 -38.735,28.194 -38.735,25.552 -38.913,25.375
  region net NetC1_1: -43.79,9.652 -44.196,9.246 -45.618,9.246 -45.999,9.627 -45.999,11.252 -45.364,11.887 -44.044,11.887 -43.79,11.633
  region net VGSM: -31.572,26.111 -32.487,27.026 -32.487,28.575 -30.048,28.575 -29.947,28.473 -29.947,26.594 -30.429,26.111
  region net 4V4: -38.735,24.638 -35.839,24.638 -34.696,25.781 -32.664,25.781 -32.664,25.171 -33.96,23.876 -38.735,23.876
  region net VBAT: -40.894,24.638 -40.894,23.876 -45.212,23.876 -45.72,24.384 -45.72,25.146 -45.212,25.654 -44.602,25.654 -43.586,24.638
Bottom Layer:
  region net NetC1_1: -43.599,11.316 -43.599,16.091 -43.18,16.51 -43.18,17.78 -45.339,17.78 -45.466,17.653 -45.466,14.351 -45.339,14.224 -45.339,11.303
  region net VGSM: -35.814,28.829 -32.741,28.829 -32.487,28.575 -27.686,28.575 -27.686,26.721 -35.763,26.721 -35.814,26.772
  region net NetC1_1: -45.288,15.088 -45.314,15.062 -45.314,11.913 -45.999,11.227 -45.999,9.627 -45.669,9.296 -44.933,9.296 -44.729,9.5 -44.729,10.77 -44.221,11.278 -43.637,11.278 -43.561,11.354 -43.561,14.91 -43.688,15.037

## Silkscreen, mask and mechanical layers (free items; w line width, h text height)
Top Overlay:
  lines w0.1: -15.494,44.37 -15.494,47.835 ; -15.394,31.435 -15.394,37.465
Bottom Overlay:
  text "MCU" at -19.355,54.94 h0.64
  text "GSM ANT" at -31.894,46.207 h0.64 r90
  text "GPS" at 1.374,8.762 h0.64
Mechanical 15:
  lines w0.2: -41.164,2.38 -41.164,56.38 -1.964,56.38 -1.964,2.38 -41.164,2.38

## Text inside footprints (layer, text, board x,y; h text height)
L1: Bottom Overlay "5.6uH" at -41.529,17.958 h0.64
U20: Bottom Overlay "*" at -2.208,51.099 h0.64 r90; Mechanical 1 "*" at -2.365,51.07 h0.64 r90